# Altium PCB Einsy_Rambo_Panel.PcbDoc
Units mil, origin at the board's own origin, x right, y up, seen from the top; angles counter-clockwise.
Board outline 4600 x 8901.57 mil, 6 copper layers (Top, GND, Signal Layer 1, Supply, Signal Layer 2, Bottom), stack 61.838 mil thick; 6 components, 0 nets, 10 pads, 0 vias.
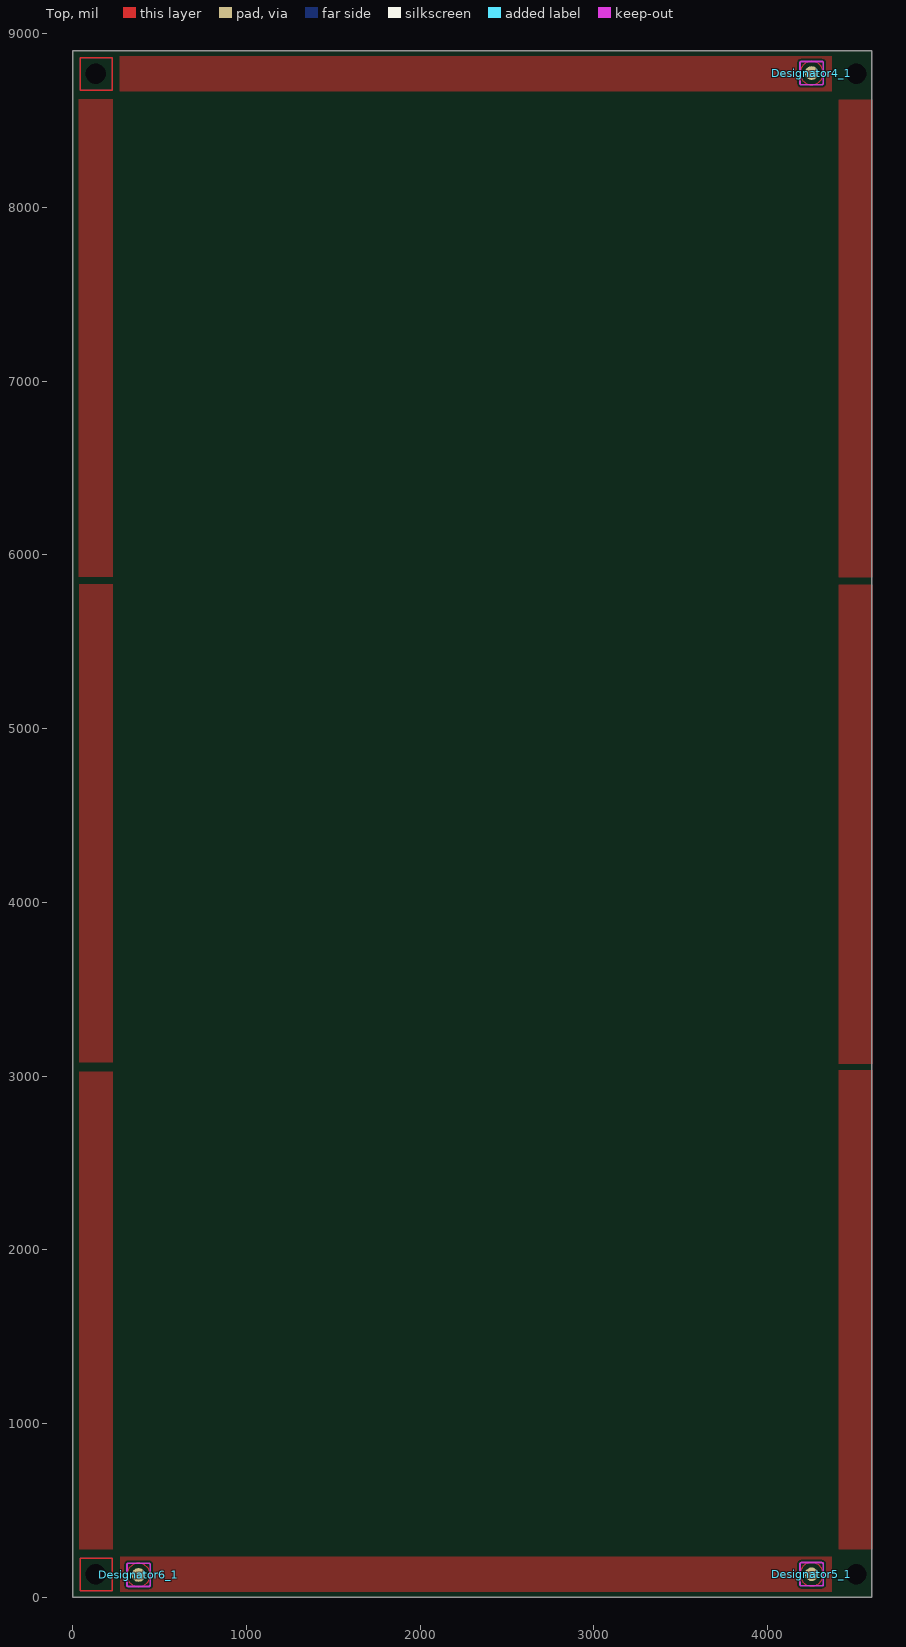
[diagram p0: Top view]
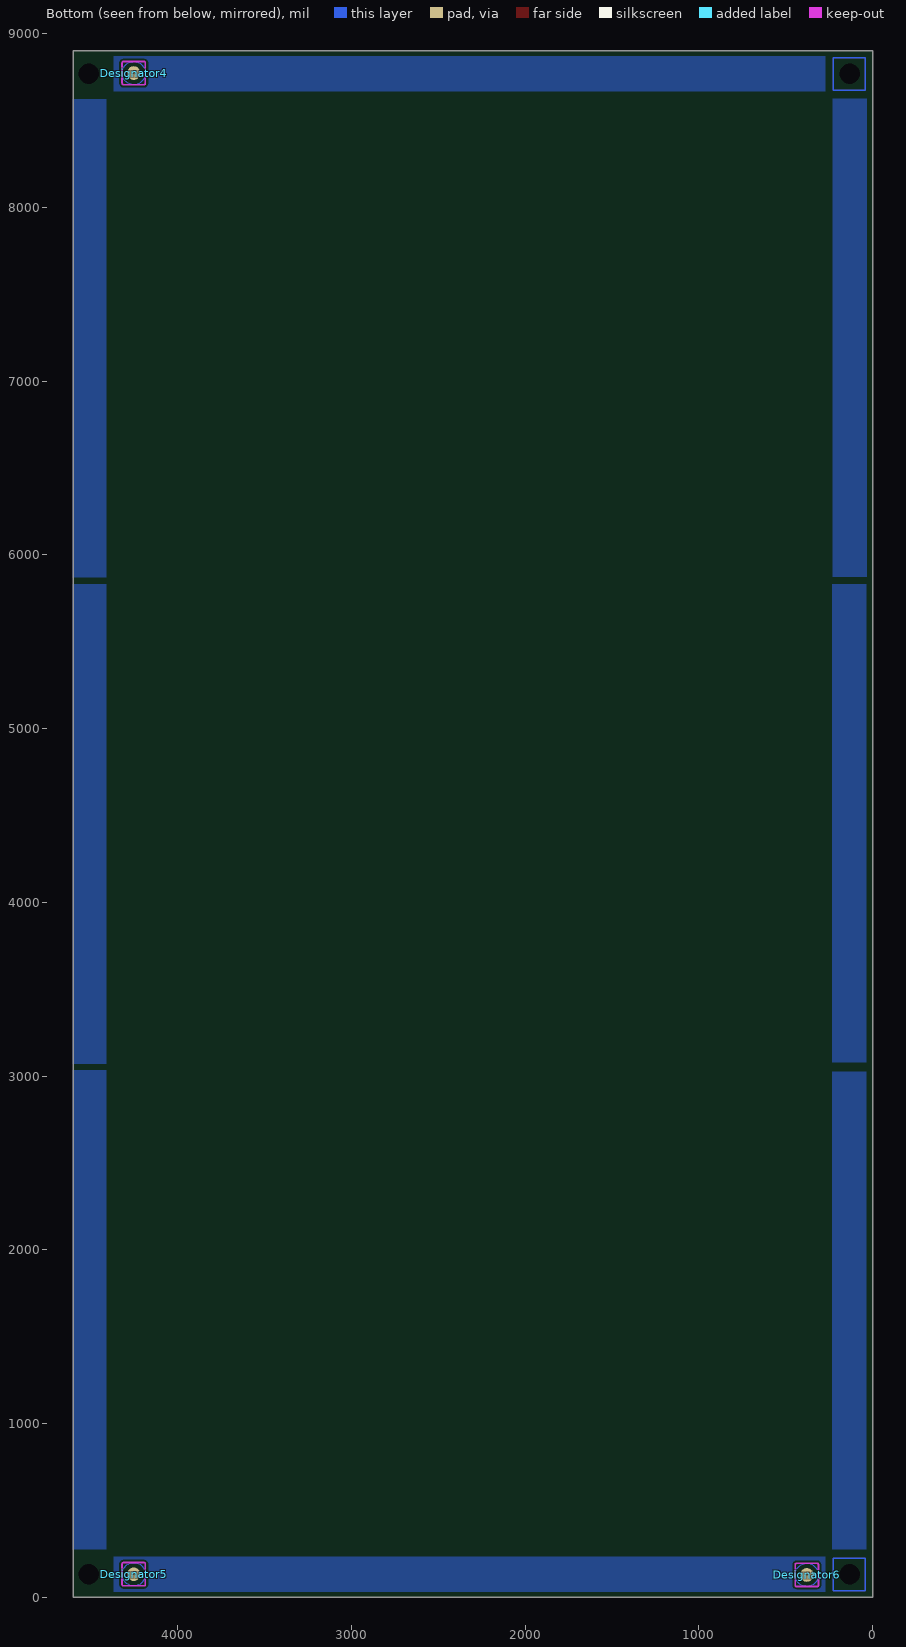
[diagram p1: Bottom view, seen from below]
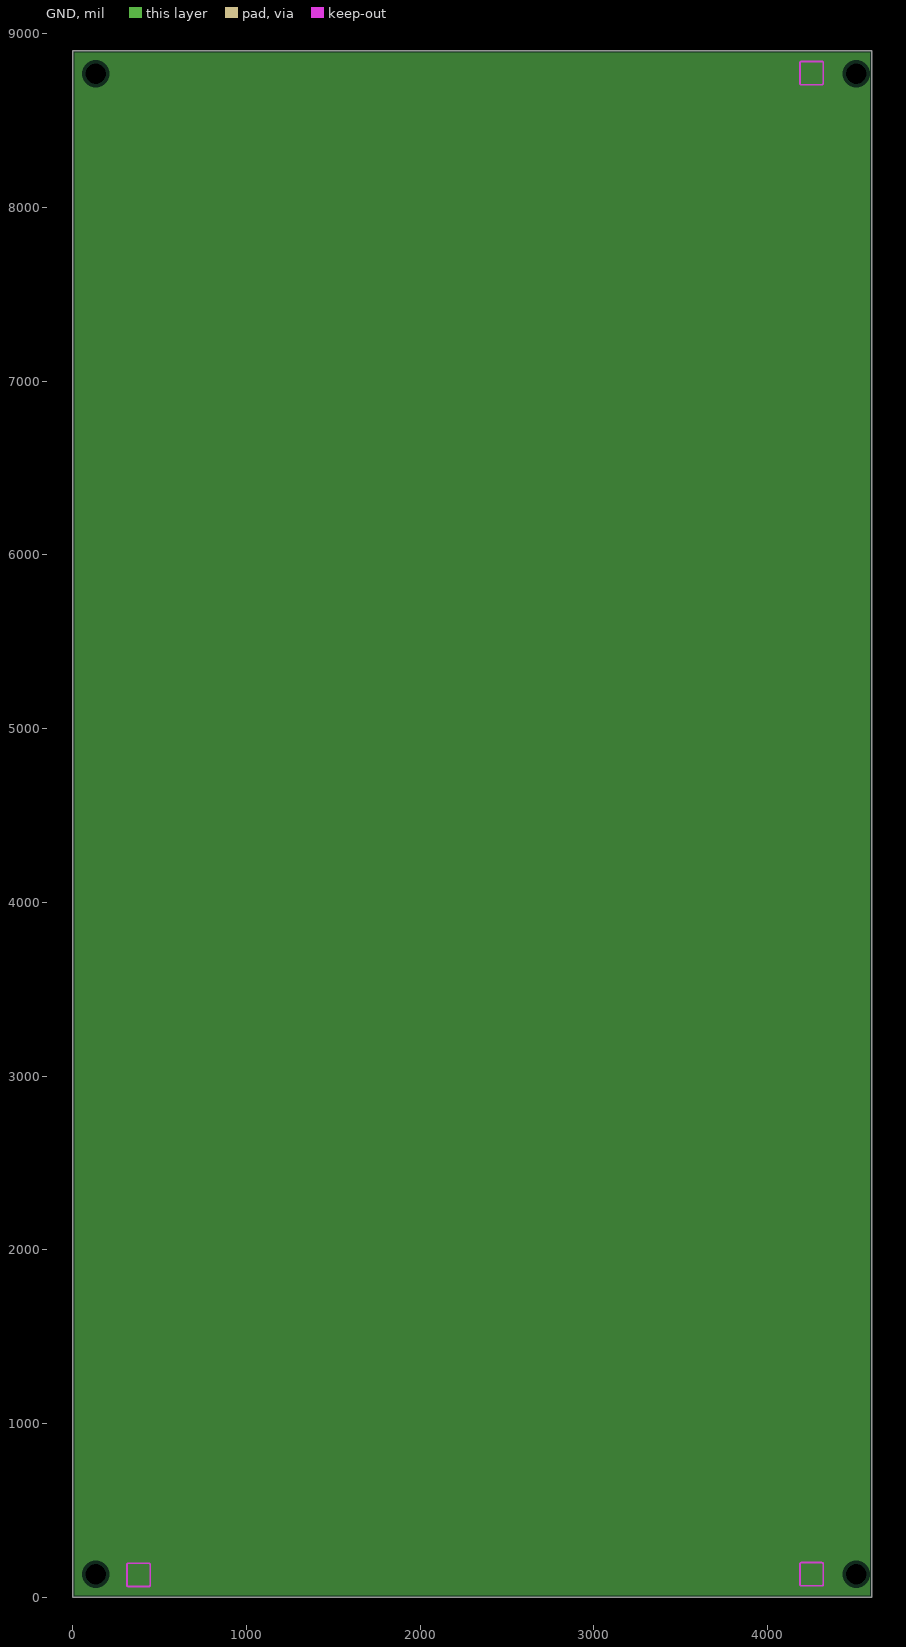
[diagram p2: GND, clearances drawn from the general rule]
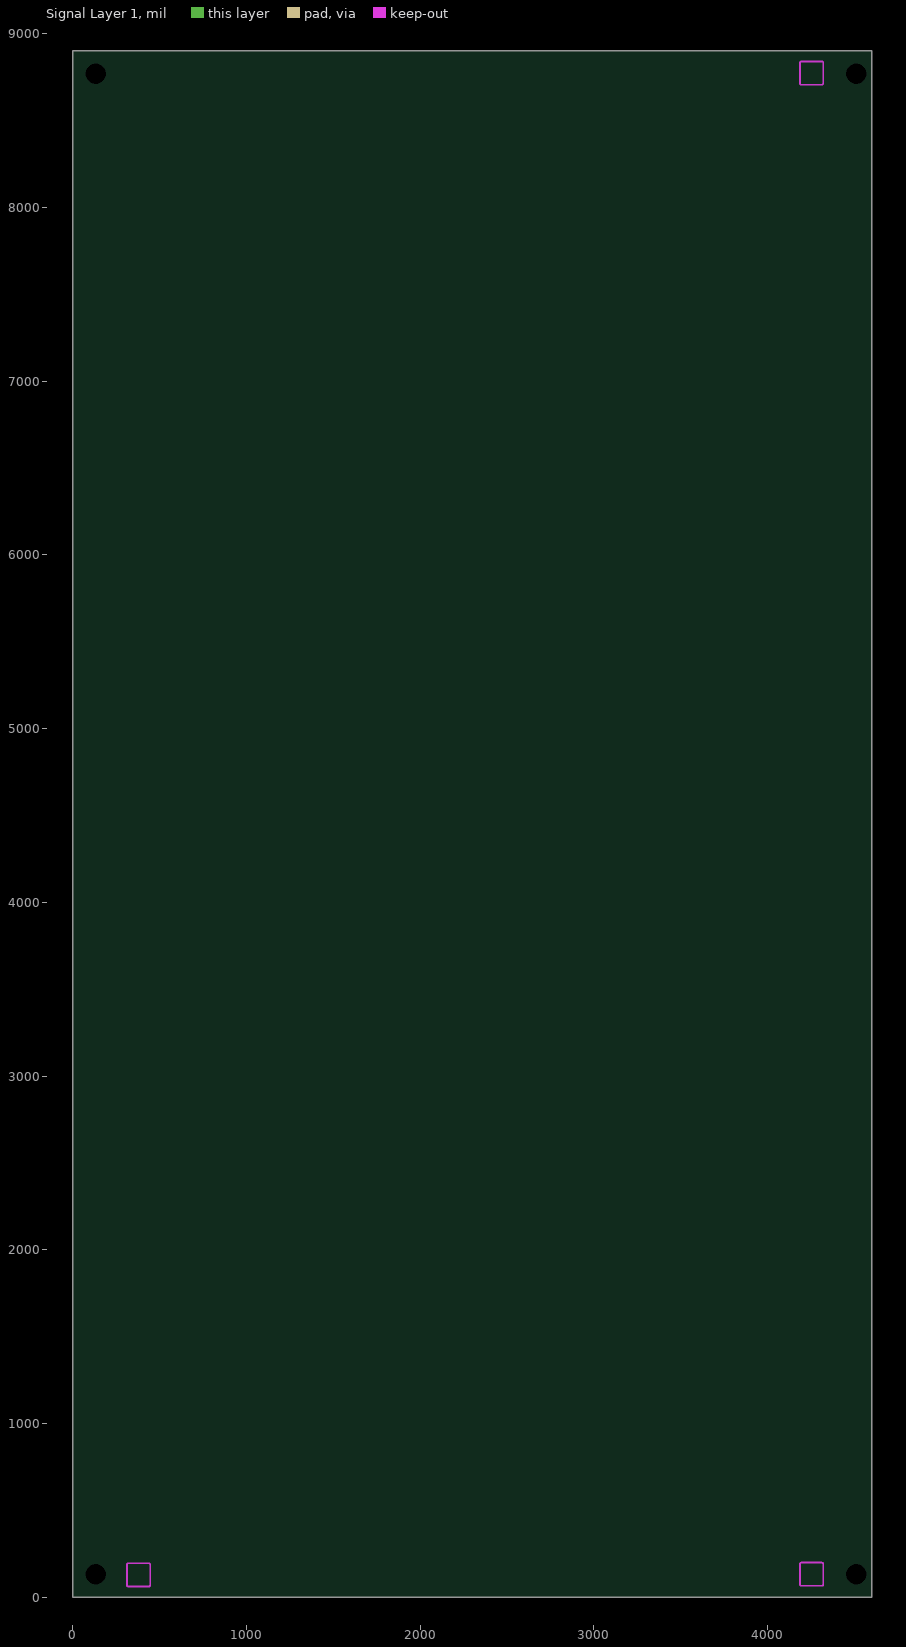
[diagram p3: Signal Layer 1]
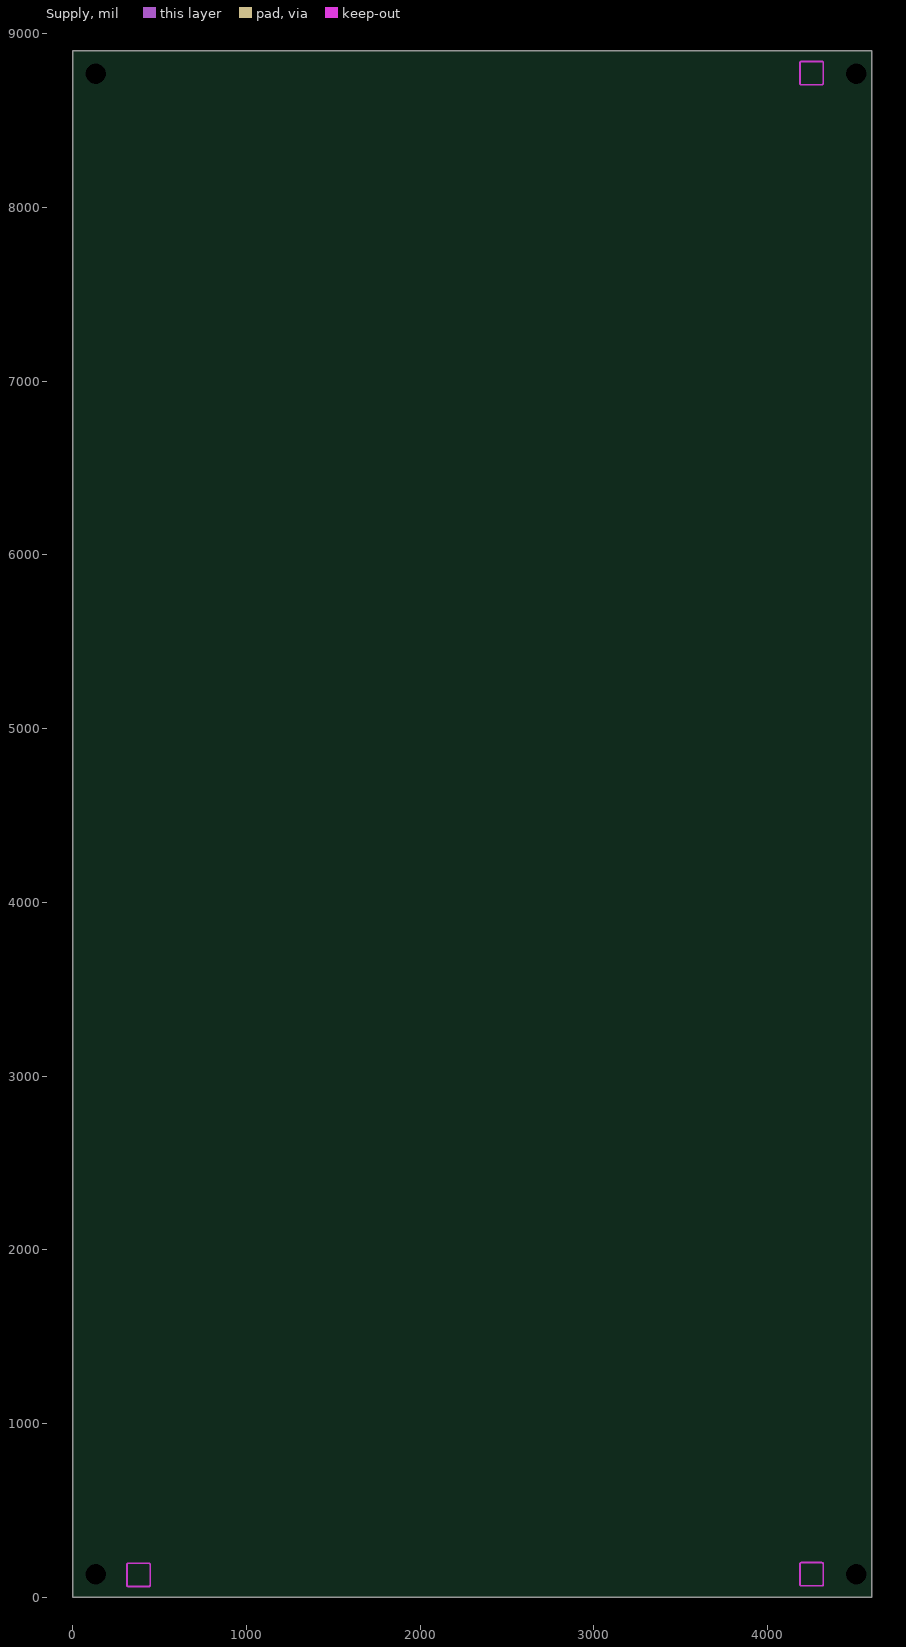
[diagram p4: Supply]
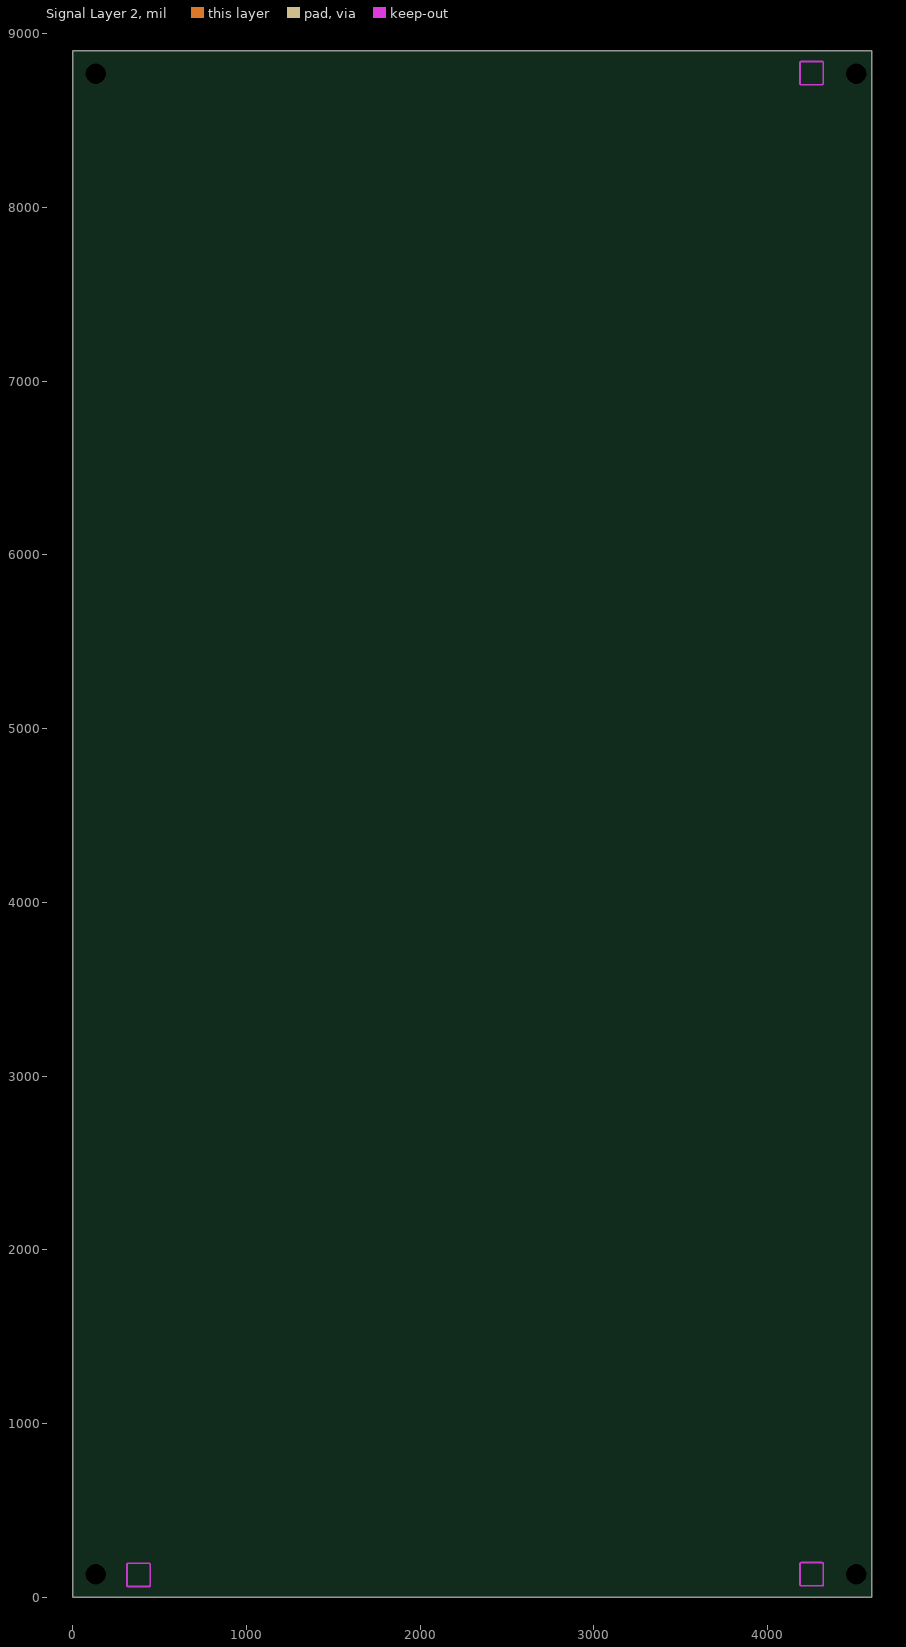
[diagram p5: Signal Layer 2]

## Layer stack, top to bottom
Top Solder: solder mask 0.472, Solder Resist, Dk 3.5
Top: signal copper 2.8
Dielectric 1: prepreg 4.321, FR-4, Dk 4.2
GND: plane copper 1.2
Dielectric 5: core 15.768, Dk 4.2
Signal Layer 1: signal copper 1.2
Dielectric 2: prepreg 11.28, FR-4, Dk 4.2
Supply: signal copper 1.2
Dielectric 3: core 15.748, FR-4, Dk 4.2
Signal Layer 2: signal copper 1.2
Dielectric 4: prepreg 4.321, Dk 4.2
Bottom: signal copper 2.8
Bottom Solder: solder mask 0.472, Solder Resist, Dk 3.5

## Board outline
0,0 4600,0 4600,8901.57 0,8901.57

## Design rules (kind name [scope] priority, off if disabled: settings)
Clearance [All] p1: gap=10 ignorepadtopadclearanceinfootprint=FALSE except(0: Arc-Hole Track-Hole SMDPad-Hole THPad-Hole Via-Hole Fill-Hole Poly-Hole Region-Hole Text-Hole)
PlaneClearance [All] p1: clearance=20
PlaneConnect [All] p1: planeconnectstyle=Relief reliefexpansion=20 reliefentries=4 reliefconductorwidth=10 reliefairgap=10
PolygonConnect [All] p1: connectstyle=Relief reliefconductorwidth=10 reliefentries=4 polygonreliefangle="90 Angle" airgapwidth=10
RoutingVias [All] p1: holewidth=28 width=50 viastyle="Through Hole" minholewidth=28 minwidth=50 maxholewidth=28 maxwidth=50
SolderMaskExpansion [All] p1: expansion=4
Width [All] p1: maxlimit=10 minlimit=10 preferedwidth=10
28 further rules are at their usual default settings.

## Components (designator, comment, footprint, x,y, rotation, side; value= is the part's Value field where it differs from the comment)
Designator4 "Comment" FIDUCIAL-2X3-PANEL 4252.83,8772.6 r90 bottom
Designator4_1 "Comment" FIDUCIAL-2X3-PANEL 4252.83,8772.6 r90 top
Designator5 "Comment" FIDUCIAL-2X3-PANEL 4252.83,132.83 r90 bottom
Designator5_1 "Comment" FIDUCIAL-2X3-PANEL 4252.83,132.83 r90 top
Designator6 "Comment" FIDUCIAL-2X3-PANEL 378.94,128.94 r90 bottom
Designator6_1 "Comment" FIDUCIAL-2X3-PANEL 378.94,128.94 r90 top

## Footprints (in the part's own frame and the unit in brackets; to place one, negate y for a bottom-side part, rotate by r counter-clockwise, add the part's x,y. Pads: shape width x height; smd on the part's side, far side on the other; paste and mask are expansions set on the pad)
FIDUCIAL-2X3-PANEL [mm]
  rrect100% 2x2 smd paste+0 mask+0.508: 1(0,0)
  Top circle w0.178: c0,0 r1.7
  Keep-Out Layer lines w0.254: -1.5,-1.7 cw(c-1.5,-1.5) -1.7,-1.5 -1.7,1.5 cw(c-1.5,1.5) -1.5,1.7 1.5,1.7 cw(c1.5,1.5) 1.7,1.5 1.7,-1.5 cw(c1.5,-1.5) 1.5,-1.7 -1.5,-1.7
  body extent -1.01,-1.01 1.02,1.01, height 0.02

## Free pads (board coordinates)
  round 0 hole 118.11 unplated paste-3897.64 mask-4.02: 0(132.87,132.87) 1(4510.83,132.87) 2(4510.83,8768.7) 3(132.87,8768.7)

## Nets (pads, with @x,y where several pads share a name; then routed paths per layer and width w, separated by ;. In a path a pad name is that pad's centre, name@x,y a point inside that pad or via, vN(x,y) a via of type N, cw(c..) or ccw(c..) an arc to the next point about the centre after c; other vN are vias at no path point)
pads on no net: Designator4.1 Designator4_1.1 Designator5.1 Designator5_1.1 Designator6.1 Designator6_1.1
copper on no net: | length 2960.6
  Top w10: 43.31,38.39 227.36,38.39 227.36,224.41 43.31,224.41 43.31,38.39 ; 43.31,8674.21 227.36,8674.21 227.36,8860.24 43.31,8860.24 43.31,8674.21
  Bottom w10: 43.31,38.39 227.36,38.39 227.36,224.41 43.31,224.41 43.31,38.39 ; 43.31,8674.21 227.36,8674.21 227.36,8860.24 43.31,8860.24 43.31,8674.21

## Polygon pours and split planes (outlines as drawn)
no net on Bottom "Frame-Copper" (solid, pour order 30): 4604.33,5829.72 4604.33,3069.88 4652.56,3069.88 4410.43,3069.88 4410.43,5829.72
no net on Bottom "Frame-Copper" (solid, pour order 32): 4604.33,3034.45 4604.33,277.56 4652.56,277.56 4410.43,277.56 4410.43,3034.45
no net on Bottom "Frame-Copper" (solid, pour order 34): 231.3,3024.61 231.3,277.56 279.53,277.56 37.4,277.56 37.4,3024.61
no net on Bottom "Frame-Copper" (solid, pour order 40): 231.3,5831.69 231.3,3079.72 279.53,3079.72 37.4,3079.72 37.4,5831.69
no net on Bottom "Frame-Copper" (solid, pour order 22): 273.62,8668.31 4367.13,8668.31 4367.13,8868.11 273.62,8868.11
no net on Bottom "Frame-Copper" (solid, pour order 28): 273.62,33.46 4367.13,33.46 4367.13,233.27 273.62,233.27
no net on Bottom "Frame-Copper" (solid, pour order 39): 229.33,8625 229.33,5873.03 277.56,5873.03 35.43,5873.03 35.43,8625
no net on Bottom "Frame-Copper" (solid, pour order 38): 4604.33,8622.05 4604.33,5870.08 4652.56,5870.08 4410.43,5870.08 4410.43,8622.05
no net on Top "Frame-Copper" (solid, pour order 29): 4604.33,5827.76 4604.33,3069.88 4652.56,3069.88 4410.43,3069.88 4410.43,5827.76
no net on Top "Frame-Copper" (solid, pour order 31): 4604.33,3034.45 4604.33,277.56 4652.56,277.56 4410.43,277.56 4410.43,3034.45
no net on Top "Frame-Copper" (solid, pour order 33): 231.3,3024.61 231.3,277.56 279.53,277.56 37.4,277.56 37.4,3024.61
no net on Top "Frame-Copper" (solid, pour order 37): 231.3,5829.72 231.3,3079.72 279.53,3079.72 37.4,3079.72 37.4,5829.72
no net on Top "Frame-Copper" (solid, pour order 21): 269.69,8668.31 4368.11,8668.31 4368.11,8868.11 269.69,8868.11
no net on Top "Frame-Copper" (solid, pour order 27): 273.62,33.46 4369.09,33.46 4369.09,233.27 273.62,233.27
no net on Top "Frame-Copper" (solid, pour order 36): 229.33,8623.03 229.33,5873.03 277.56,5873.03 35.43,5873.03 35.43,8623.03
no net on Top "Frame-Copper" (solid, pour order 35): 4604.33,8620.08 4604.33,5870.08 4652.56,5870.08 4410.43,5870.08 4410.43,8620.08
no net on GND (split plane): 4589.91,10.09 10.09,10.09 10.09,8891.49 4589.91,8891.49

## Other copper
Top:
  text "EinsyRetro 1.0b" at -27.17,9452.83 h60
  text "Top Signal" at -27.17,9332.83 h60
  text "Layer 1" at -27.17,9212.83 h60
Supply:
  text "EinsyRetro 1.0b" at 2692.83,9452.83 h60
  text "Mid Signal 2" at 2692.83,9332.83 h60
  text "Layer 4" at 2692.83,9212.83 h60
Signal Layer 1:
  text "EinsyRetro 1.0b" at 1792.83,9452.83 h60
  text "Mid Signal 1" at 1792.83,9332.83 h60
  text "Layer 3" at 1792.83,9212.83 h60
Signal Layer 2:
  text "EinsyRetro 1.0b" at 3597.83,9462.83 h60
  text "Mid Signal 3" at 3597.83,9342.83 h60
  text "Layer 5" at 3597.83,9222.83 h60
Bottom:
  text "EinsyRetro 1.0b" at 4492.83,9452.83 h60
  text "Bottom Signal" at 4492.83,9332.83 h60
  text "Layer 6" at 4492.83,9212.83 h60
GND (plane layer: these items are gaps in the copper):
  text "EinsyRetro 1.0b" at 882.83,9452.83 h60
  text "GND Plane" at 882.83,9332.83 h60
  text "Layer 2" at 882.83,9212.83 h60

## Silkscreen, mask and mechanical layers (free items; w line width, h text height)
Top Overlay:
  text "EinsyRetro 1.0b" at -27.17,9732.83 h60
  text "Top Silkscreen" at -27.17,9612.83 h60
Bottom Overlay:
  text "EinsyRetro 1.0b" at 892.83,9732.83 h60
  text "Bottom Silkscreen" at 892.83,9612.83 h60
Top Paste:
  text "EinsyRetro 1.0b" at 1852.83,10282.83 h60
  text "Top Paste" at 1852.83,10162.83 h60
Top Solder:
  text "EinsyRetro 1.0b" at 1847.83,9997.83 h60
  text "Top Soldermask" at 1847.83,9872.83 h60
Bottom Solder:
  text "EinsyRetro 1.0b" at 2772.83,9997.83 h60
  text "Bottom Soldermask" at 2772.83,9872.83 h60
Dimension:
  lines w10: 4592.83,0 0,0 0,8901.57 4600,8901.57 4600,0
  text "EinsyRetro 1.0b" at 925,10300 h60
  text "Panel" at 925,10175 h60
Drill Drawing:
  drawing of 503 lines, arcs and shapes, not listed
  text "EinsyRetro 1.0b" at 932.83,10012.83 h60
  text "Drill Drawing" at 932.83,9892.83 h60
  text "File" at 5552.83,4472.83 h60
  text "Top Paste" at 6292.83,4352.83 h60
  text "GTP" at 5552.83,4332.83 h60
  text "Layer" at 5883.18,4212.83 h60
  text "Name" at 6293.09,4212.83 h60
  text "Material" at 7232.83,4212.83 h60
  text "Thickness" at 8092.6,4212.83 h60
  text "Constant" at 8742.44,4212.83 h60
  text "Board Layer Stack" at 9312.3,4212.83 h60
  text "GTO" at 5552.83,4092.83 h60
  text "1" at 5883.18,4092.83 h60
  text "Top Overlay" at 6293.09,4092.83 h60
  text "GTS" at 5552.83,3972.83 h60
  text "2" at 5883.18,3972.83 h60
  text "Top Solder" at 6293.09,3972.83 h60
  text "Solder Resist" at 7232.83,3972.83 h60
  text "0.47mil" at 8092.6,3972.83 h60
  text "3.5" at 8742.44,3972.83 h60
  text "GTL" at 5552.83,3852.83 h60
  text "3" at 5883.18,3852.83 h60
  text "Top" at 6293.09,3852.83 h60
  text "Copper" at 7232.83,3852.83 h60
  text "2.80mil" at 8092.6,3852.83 h60
  text "Notes:" at 10512.83,3852.83 h60
  text "4" at 5883.18,3732.83 h60
  text "Dielectric 1" at 6293.09,3732.83 h60
  text "FR-4" at 7232.83,3732.83 h60
  text "4.32mil" at 8092.6,3732.83 h60
  text "4.2" at 8742.44,3732.83 h60
  text "GP1" at 5547.83,3622.83 h60
  text "5" at 5883.18,3612.83 h60
  text "GND" at 6293.09,3612.83 h60
  text "Copper" at 7232.83,3612.83 h60
  text "1.20mil" at 8092.6,3612.83 h60
  text "Orange Silkscreen" at 10512.83,3612.83 h60
  text "6" at 5883.18,3492.83 h60
  text "Dielectric 5" at 6293.09,3492.83 h60
  text "15.77mil" at 8092.6,3492.83 h60
  text "4.2" at 8742.44,3492.83 h60
  text "Matte Black Soldermask" at 10512.83,3472.83 h60
  text "G1" at 5547.83,3397.83 h60
  text "7" at 5883.18,3372.83 h60
  text "Signal Layer 1" at 6293.09,3372.83 h60
  text "Copper" at 7232.83,3372.83 h60
  text "1.20mil" at 8092.6,3372.83 h60
  text "8" at 5883.18,3252.83 h60
  text "Dielectric 2" at 6293.09,3252.83 h60
  text "FR-4" at 7232.83,3252.83 h60
  text "11.28mil" at 8092.6,3252.83 h60
  text "4.2" at 8742.44,3252.83 h60
  text "G2" at 5547.83,3147.83 h60
  text "9" at 5883.18,3132.83 h60
  text "Supply" at 6293.09,3132.83 h60
  text "Copper" at 7232.83,3132.83 h60
  text "1.20mil" at 8092.6,3132.83 h60
  text "10" at 5883.18,3012.83 h60
  text "Dielectric 3" at 6293.09,3012.83 h60
  text "FR-4" at 7232.83,3012.83 h60
  text "15.75mil" at 8092.6,3012.83 h60
  text "4.2" at 8742.44,3012.83 h60
  text "G3" at 5557.83,2892.83 h60
  text "11" at 5883.18,2892.83 h60
  text "Signal Layer 2" at 6293.09,2892.83 h60
  text "Copper" at 7232.83,2892.83 h60
  text "1.20mil" at 8092.6,2892.83 h60
  text "12" at 5883.18,2772.83 h60
  text "Dielectric 4" at 6293.09,2772.83 h60
  text "4.32mil" at 8092.6,2772.83 h60
  text "4.2" at 8742.44,2772.83 h60
  text "GBL" at 5552.83,2652.83 h60
  text "13" at 5883.18,2652.83 h60
  text "Bottom" at 6293.09,2652.83 h60
  text "Copper" at 7232.83,2652.83 h60
  text "2.80mil" at 8092.6,2652.83 h60
  text "GBS" at 5552.83,2532.83 h60
  text "14" at 5883.18,2532.83 h60
  text "Bottom Solder" at 6293.09,2532.83 h60
  text "Solder Resist" at 7232.83,2532.83 h60
  text "0.47mil" at 8092.6,2532.83 h60
  text "3.5" at 8742.44,2532.83 h60
  text "Matte Black Soldermask" at 10492.83,2532.83 h60
  text "GBO" at 5552.83,2412.83 h60
  text "15" at 5883.18,2412.83 h60
  text "Bottom Overlay" at 6293.09,2412.83 h60
  text "Orange Silkscreen" at 10492.83,2392.83 h60
  text "Symbol" at 5909.15,2092.83 h72
  text "Hit Count" at 6415.02,2092.83 h72
  text "Finished Hole Size" at 7112.83,2092.83 h72
  text "Plated" at 8458.44,2092.83 h72
  text "Hole Type" at 8964.31,2092.83 h72
  text "6" at 6415.02,1942.83 h60
  text "1.397mm (55.00mil)" at 7112.83,1942.83 h60
  text "PTH" at 8458.44,1942.83 h60
  text "Round" at 8964.31,1942.83 h60
  text "6" at 6415.02,1792.83 h60
  text "1.499mm (59.00mil)" at 7112.83,1792.83 h60
  text "PTH" at 8458.44,1792.83 h60
  text "Round" at 8964.31,1792.83 h60
  text "6" at 6415.02,1642.83 h60
  text "2.210mm (87.00mil)" at 7112.83,1642.83 h60
  text "PTH" at 8458.44,1642.83 h60
  text "Round" at 8964.31,1642.83 h60
  text "16" at 6415.02,1492.83 h60
  text "3.000mm (118.11mil)" at 7112.83,1492.83 h60
  text "NPTH" at 8458.44,1492.83 h60
  text "Round" at 8964.31,1492.83 h60
  text "18" at 6415.02,1342.83 h60
  text "1.524mm (60.00mil)" at 7112.83,1342.83 h60
  text "PTH" at 8458.44,1342.83 h60
  text "Round" at 8964.31,1342.83 h60
  text "30" at 6415.02,1192.83 h60
  text "0.965mm (38.00mil)" at 7112.83,1192.83 h60
  text "PTH" at 8458.44,1192.83 h60
  text "Round" at 8964.31,1192.83 h60
  text "36" at 6415.02,1042.83 h60
  text "1.600mm (63.00mil)" at 7112.83,1042.83 h60
  text "PTH" at 8458.44,1042.83 h60
  text "Round" at 8964.31,1042.83 h60
  text "90" at 6415.02,892.83 h60
  text "0.900mm (35.43mil)" at 7112.83,892.83 h60
  text "PTH" at 8458.44,892.83 h60
  text "Round" at 8964.31,892.83 h60
  text "159" at 6415.02,742.83 h60
  text "1.016mm (40.00mil)" at 7112.83,742.83 h60
  text "PTH" at 8458.44,742.83 h60
  text "Round" at 8964.31,742.83 h60
  text "915" at 6415.02,592.83 h60
  text "0.381mm (15.00mil)" at 7112.83,592.83 h60
  text "PTH" at 8458.44,592.83 h60
  text "Round" at 8964.31,592.83 h60
  text "1824" at 6415.02,442.83 h60
  text "0.254mm (10.00mil)" at 7112.83,442.83 h60
  text "PTH" at 8458.44,442.83 h60
  text "Round" at 8964.31,442.83 h60
  text "3106 Total" at 6415.02,292.83 h60
UL:
  lines w10: 3240.61,2597.04 3240.61,2754.52 3476.83,2754.52 3476.83,2597.04 3240.61,2597.04 ; 3240.61,5397.04 3240.61,5554.52 3476.83,5554.52 3476.83,5397.04 3240.61,5397.04 ; 3240.61,8197.04 3240.61,8354.52 3476.83,8354.52 3476.83,8197.04 3240.61,8197.04 ; 3305.06,2037.57 3681.5,2037.57 3681.5,2390.57 3305.06,2390.57 3305.06,2037.57 ; 3305.06,4837.57 3681.5,4837.57 3681.5,5190.57 3305.06,5190.57 3305.06,4837.57 ; 3305.06,7637.57 3681.5,7637.57 3681.5,7990.57 3305.06,7990.57 3305.06,7637.57
  text "EinsyRetro 1.0b" at -25,10300 h60
  text "UL Markings" at -25,10175 h60
  text "Bot Silk" at 3440.88,8211.39 h32
  text "UL" at 3451.86,7799.01 h30
  text "Bot Silk" at 3626.91,7687.77 h40
  text "Bot Silk" at 3440.88,5411.39 h32
  text "UL" at 3451.86,4999.01 h30
  text "Bot Silk" at 3626.91,4887.77 h40
  text "Bot Silk" at 3440.88,2611.39 h32
  text "UL" at 3451.86,2199.01 h30
  text "Bot Silk" at 3626.91,2087.77 h40
Panel Dimension:
  text "EinsyRetro 1.0b" at -27.17,10012.83 h60
  text "Panel Dimension" at -27.17,9892.83 h60
V-Score:
  lines w10: 0,250 4600,250 ; 0,3051.18 4600,3051.18 ; 0,5850.39 4600,5850.39 ; 2.95,8651.57 4600,8651.57 ; 250,3.94 250,8901.57 ; 4389.76,0 4389.76,8901.57
  text "EinsyRetro 1.0b" at 2877.83,9732.83 h60
  text "V-Score" at 2877.83,9612.83 h60
Mechanical 32:
  the board outline again, w10
  text "EinsyRetro 1.0b" at 1932.83,9732.83 h60
  text "Panel Outline" at 1932.83,9612.83 h60

## Dimensions
0,0 to 4600,0 on Bot Courtyard
0,0 to 0,8901.57 on Bot Courtyard

## Panel: embedded boards
"..\EinsyRetro.PcbDoc" at 253.94,253.94, 3 rows x 1 columns, spacing 2799.21 x 4137.8, rotation 0